# EAGLE board PCB-IDC-DIST (EAGLE 6.2)
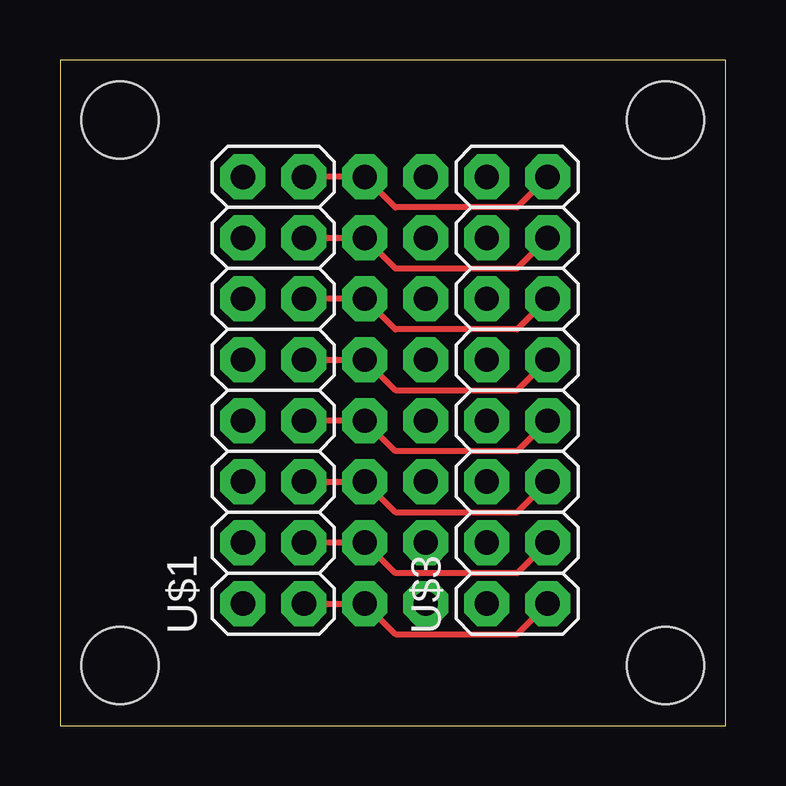
[diagram p0: board, top side]
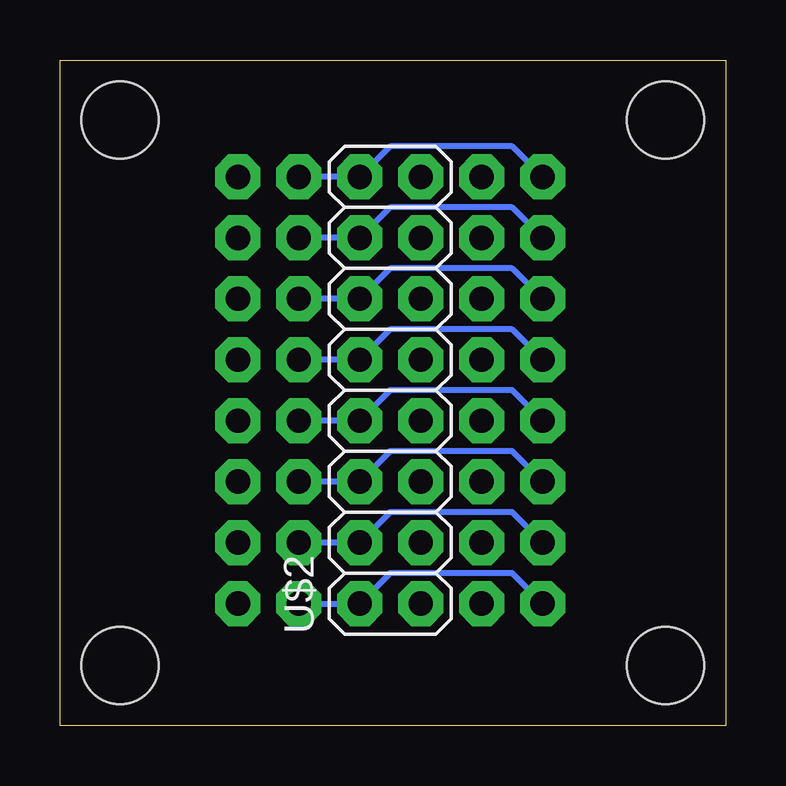
[diagram p1: board, bottom side, seen from below]

Size 27.73 x 27.73 mm. Coordinates in mm from the lower left corner, seen from the top.
Outline: 0,0 27.73,0 27.73,27.73 0,27.73 0,0
Copper layers (1*16): Top 0.035mm / dielectric 1.5mm / Bottom 0.035mm
Design rules: minimum track width 6mil, minimum drill 12mil, track to track 6mil, track to pad 6mil, pad to pad 6mil, via to via 6mil, smd to smd 0mil, copper to edge 10mil, drill to drill 10mil, minimum pad ring 10mil, minimum via ring 6mil, stop-mask expansion 2mil, vias tented up to drill 100mil, thermal gap 10mil
Net classes: 0 default: width 0.254 mm, drill 0.406 mm, clearance 0.203 mm
Holes 3.2 mm at 2.5,25.23 25.23,25.23 25.23,2.5 2.5,2.5

## Footprints (pad centres in the part's own frame; a part is rotated, then mirrored left to right if it is on the bottom)
2X8 = drill 1.016 pad 1.88 octagon: 1 0,0; 2 0,2.54; 3 2.54,0; 4 2.54,2.54; 5 5.08,0; 6 5.08,2.54; 7 7.62,0; 8 7.62,2.54; 9 10.16,0; 10 10.16,2.54; 11 12.7,0; 12 12.7,2.54; 13 15.24,0; 14 15.24,2.54; 15 17.78,0; 16 17.78,2.54

## Placement (x,y rotation side)
U$1  M08X2  [2X8]  10.16,5.08 90 top
U$2  M08X2  [2X8]  12.7,5.08 90 bottom
U$3  M08X2  [2X8]  20.32,5.08 90 top

## Library data of the parts
U$1-U$3 = SparkFun

## Nets
N$1: U$1.2 U$2.2 U$3.2
N$2: U$1.4 U$2.4 U$3.4
N$3: U$1.6 U$2.6 U$3.6
N$4: U$1.8 U$2.8 U$3.8
N$5: U$1.10 U$2.10 U$3.10
N$6: U$1.12 U$2.12 U$3.12
N$7: U$1.14 U$2.14 U$3.14
N$8: U$1.16 U$2.16 U$3.16
N$9: U$1.1 U$2.1 U$3.1
N$10: U$1.3 U$2.3 U$3.3
N$11: U$1.5 U$2.5 U$3.5
N$12: U$1.7 U$2.7 U$3.7
N$13: U$1.9 U$2.9 U$3.9
N$14: U$1.11 U$2.11 U$3.11
N$15: U$1.13 U$2.13 U$3.13
N$16: U$1.15 U$2.15 U$3.15

## Tracks (layer width: path | path; a pad name or v marks a point on that pad's centre or on a via)
N$1
  Bottom 0.254: U$1.2 8.89,6.35 13.97,6.35 U$2.2 U$3.2
N$2
  Bottom 0.254: U$1.4 8.89,8.89 13.97,8.89 U$2.4 U$3.4
N$3
  Bottom 0.254: U$1.6 8.89,11.43 13.97,11.43 U$2.6 U$3.6
N$4
  Bottom 0.254: U$1.8 8.89,13.97 13.97,13.97 U$2.8 U$3.8
N$5
  Bottom 0.254: U$1.10 8.89,16.51 13.97,16.51 U$2.10 U$3.10
N$6
  Bottom 0.254: U$1.12 8.89,19.05 13.97,19.05 U$2.12 U$3.12
N$7
  Bottom 0.254: U$1.14 8.89,21.59 13.97,21.59 U$2.14 U$3.14
N$8
  Bottom 0.254: U$1.16 8.89,24.13 13.97,24.13 U$2.16 U$3.16
N$9
  Top 0.254: U$1.1 U$2.1 13.97,3.81 19.05,3.81 U$3.1
N$10
  Top 0.254: U$3.3 19.05,6.35 13.97,6.35 U$2.3 U$1.3
N$11
  Top 0.254: U$1.5 U$2.5 13.97,8.89 19.05,8.89 U$3.5
N$12
  Top 0.254: U$3.7 19.05,11.43 13.97,11.43 U$2.7 U$1.7
N$13
  Top 0.254: U$1.9 U$2.9 13.97,13.97 19.05,13.97 U$3.9
N$14
  Top 0.254: U$3.11 19.05,16.51 13.97,16.51 U$2.11 U$1.11
N$15
  Top 0.254: U$1.13 U$2.13 13.97,19.05 19.05,19.05 U$3.13
N$16
  Top 0.254: U$3.15 19.05,21.59 13.97,21.59 U$2.15 U$1.15